# Altium PCB 控制盒基板-布局备份.PcbDoc (part 2 of 2)
Units mil, origin at the board's own origin, x right, y up, seen from the top; angles counter-clockwise.
Board outline 12046.02 x 6189.14 mil, 4 copper layers (Top Layer, SGND, POWER, Bottom Layer); 371 components, 226 nets, 1114 pads, 72 vias.
Unrouted connection lines stored in the file: 329.
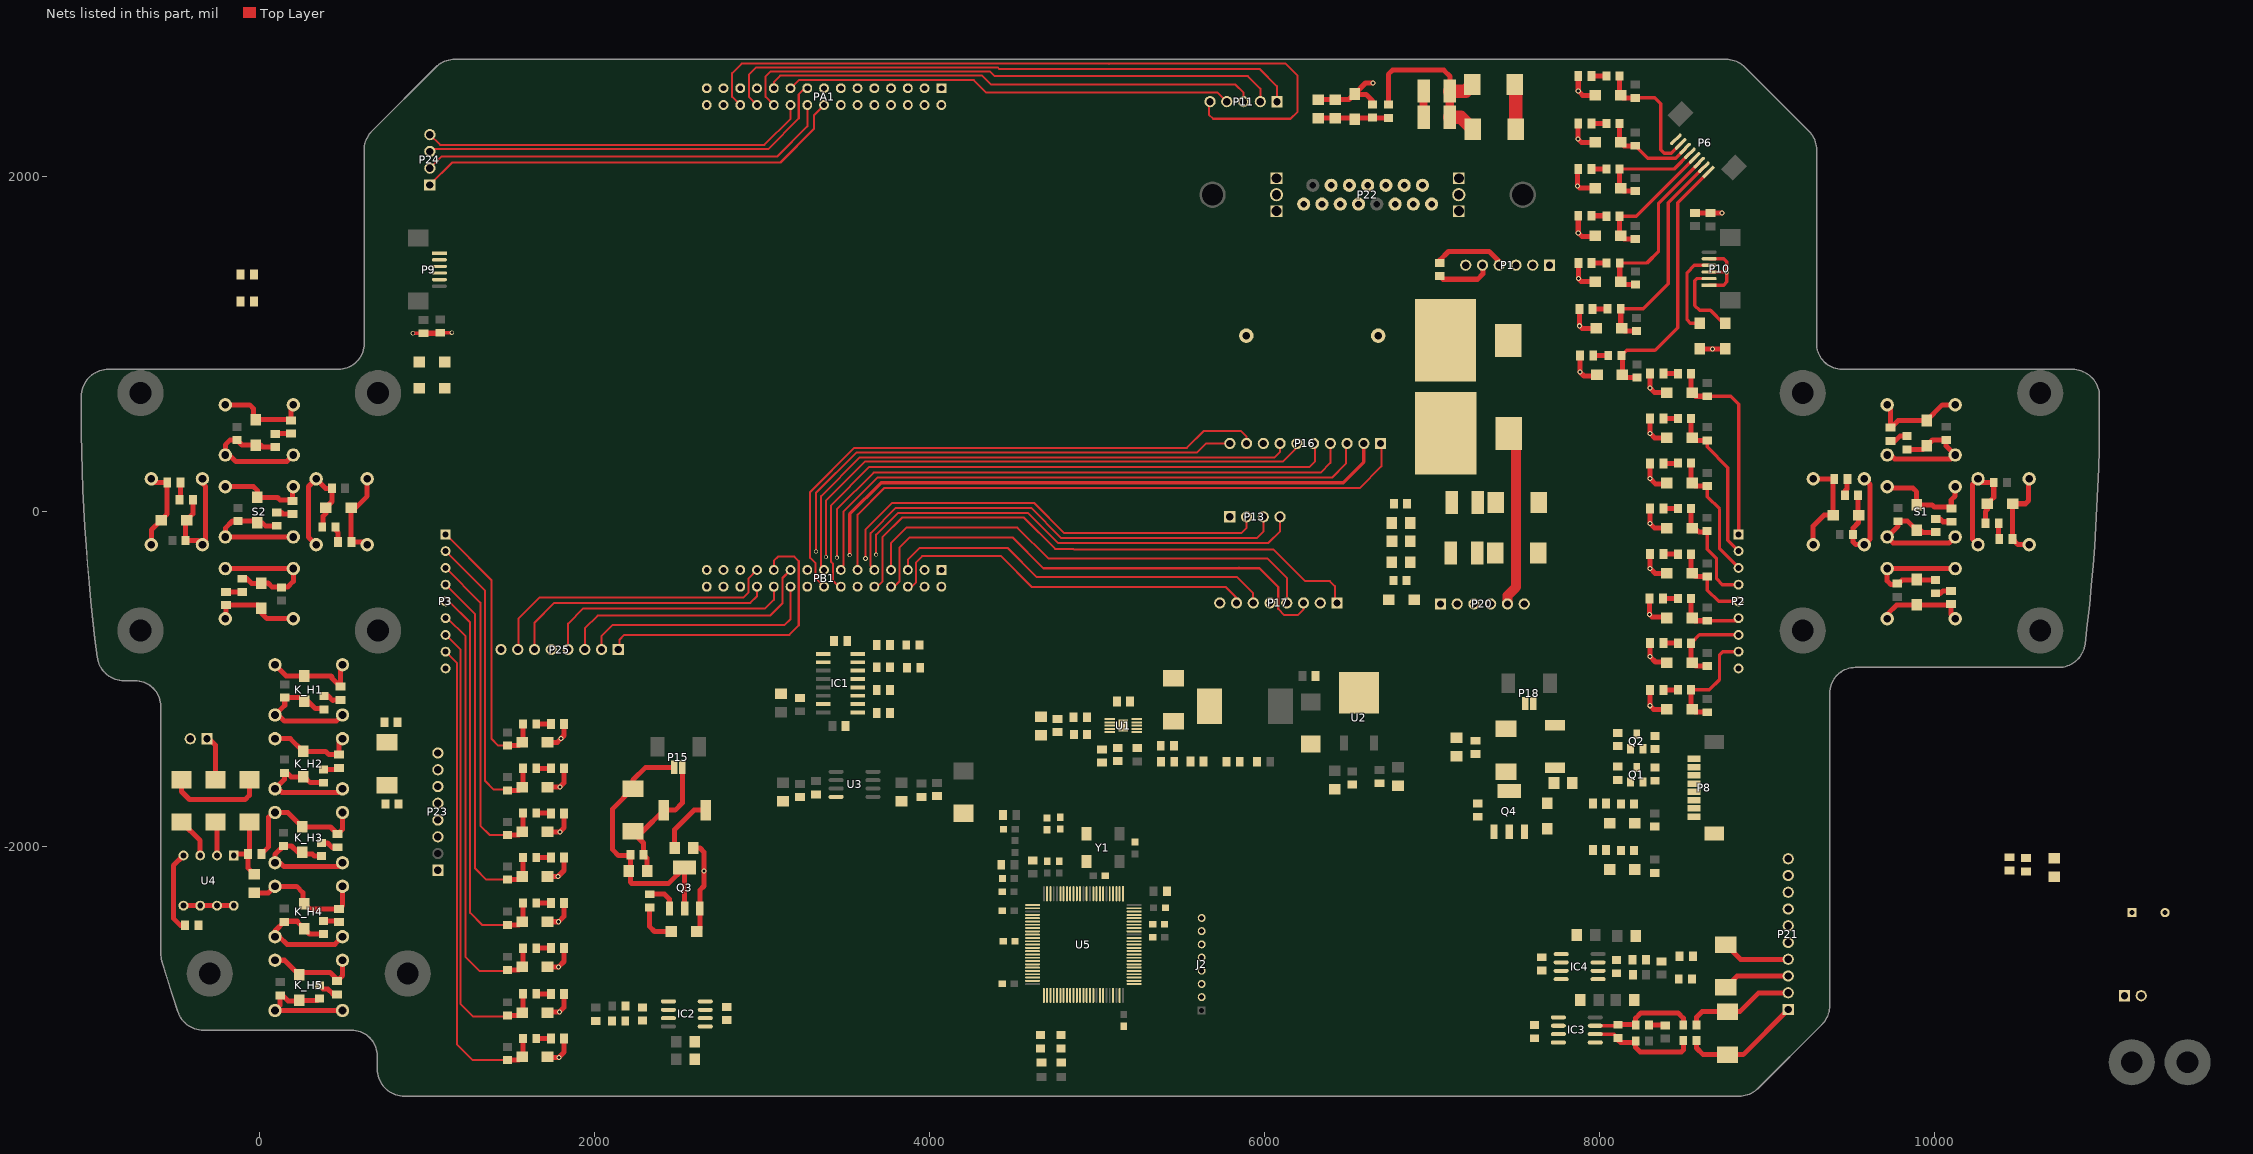
[diagram p3: the nets of this part, all layers, seen from the top]

## Via types
v1: diameter 30, hole 18, Top Layer to Bottom Layer, tented both sides, 57 vias
v2: diameter 28, hole 18, Top Layer to Bottom Layer, tented both sides, 10 vias
v3: diameter 24, hole 16, Top Layer to Bottom Layer, tented both sides, 5 vias

## Nets (pads, with @x,y where several pads share a name; then routed paths per layer and width w, separated by ;. In a path a pad name is that pad's centre, name@x,y a point inside that pad or via, vN(x,y) a via of type N, cw(c..) or ccw(c..) an arc to the next point about the centre after c; other vN are vias at no path point) (continued)
+PWR_S: C1.2 C2.2 C5.1 C77.1 C78.2 C80.2 C81.2 C87.2 D1.2 D2.2 L2.2 L3.2 P1.3 P1.4 P20.5 P22.5 P23.1 PA1.28 PA1.30 R1.1 R2.1 R83.1 R84.1 U1.2 U4.1 | length 2268.7
  Top Layer w30: U4.1@-152.5,-2050.98 -144.51,-2043 C80.2@-66.37,-2043 ; C77.1@-59,-1850.98 -59,-2035.63 C80.2@-66.37,-2043 ; C78.2@-30,-2163.88 -66.37,-2127.51 C80.2@-66.37,-2043 ; C81.2@2478.88,-2007 2478.88,-1897.12 2595,-1781 L2.2@2665.98,-1781 ; R1.1@7046,1485.37 7046,1502 7098,1554 7341,1554 7404,1491 P1.4@7404,1467
  Top Layer w60: P20.5@7450,-550 7450,-501 7501,-450 7501,424.98 D1.2@7457.98,468
A_LX: C71.1 D50.2 P10.4 U5.15 | length 517.6
  Top Layer w20: D50.2@8598.34,1124.45 8597.79,1125 8542,1125 8522,1145 8522,1428 8564.87,1470.87 P10.4@8654.01,1470.87
A_LY: C73.1 D52.2 P10.2 U5.16 | length 466.5
  Top Layer w20: P10.2@8654.01,1392.13 8580.13,1392.13 8568,1380 8568,1231 8597,1202 8662,1202 8739.55,1124.45 D52.2@8750.34,1124.45
A_RX: C72.1 D51.2 P9.4 U5.18
A_RY: C74.1 D53.2 P9.2 U5.33
AUDIO_OUT_L: C85.1 P17.6 PB1.5 | length 2322.7
  Top Layer w12: PB1.5@3871,-347 3871,-286 3942,-215 4466,-215 4641,-390 5837,-390 5931,-484 5931,-542 P17.6@5933,-544
AUDIO_OUT_R: P17.7 PB1.6 | length 2240.8
  Top Layer w12: PB1.6@3871,-447 3895,-447 3919,-423 3919,-303 3957,-265 4428,-265 4612,-449 5172,-449 5181,-449 5768,-449 5833,-514 P17.7@5833,-544
AUX: P11.5 PA1.26 | length 4493.2
  Top Layer w12: PA1.26@2871,2428 2822,2477 2822,2618 2879,2675 5072,2675 ; 5073,2674 5072,2675 ; P11.5@5675,2448 5668,2441 5668,2371 5693,2346 6155,2346 6198,2389 6198,2603 6126,2675 5072,2675
BAT1_ADC: C16.2 C18.2 C22.2 D8.2 R9.2 R11.1 U5.23
BAT1_FIN: D3.1 D4.1 F1.2 F2.2 R9.1
BAT1_IN: F1.1 F2.1 P20.1 P20.2
BAT2_ADC: C17.2 C19.2 C23.2 D9.2 R10.2 R12.1 U5.24 | length 421.8
  Top Layer w30: C17.2@6321,2350.07 6538,2350.07 6740.03,2350.07 R10.2@6742,2348.1
BAT2_FIN: D5.1 D6.1 F3.2 F4.2 R10.1 | length 1133.2
  Top Layer w30: R10.1@6740,2430.37 6739,2431.37 6739,2611 6764,2636 7070,2636 7106.74,2599.26 F3.2@7106.74,2511
  Top Layer w50: F4.2@7106.74,2355 F3.2@7106.74,2511
  Top Layer w80: F4.2@7106.74,2355 7171.05,2355 D6.1@7243.05,2283 ; F3.2@7106.74,2511 7200.05,2511 D5.1@7239.05,2550
BAT2_IN: F3.1 F4.1 P22.1 P22.2 | length 156
  Top Layer w50: F4.1@6949.26,2355 F3.1@6949.26,2511
BAT_IN: D3.2 D4.2 D5.2 D6.2 P1.1 P1.2 | length 268.7
  Top Layer w80: D5.2@7494.95,2550 7498.95,2546 D6.2@7498.95,2283
CAN1H: P14.1
CAN1L: P14.2
CLOCK: U5.12 Y1.3
CVBS1: P21.5 P22.16 PA1.23
CVBS2: P13.1 PA1.25
GND: R97.2 R98.1
GND_S: C116.1 C117.1 C118.1 C119.1 C120.1 C121.1 R104.2 R105.2 R106.2
GPT9_PWM_EVT: PB1.1
H_RST: PB1.4
I2C2_SCL: PA1.13
I2C2_SDA: PA1.14
I2C_SDA: U5.96
I2C_SDL: U5.95
JNRST: J2.6 U5.90
JOYSTICK_LEFTZ: U5.17
JOYSTICK_RIGHTZ: U5.34
JTCK: J2.3 U5.76
JTDI: J2.4 U5.77
JTDO: J2.5 U5.89
JTMS: J2.2 U5.72
K_M1: U5.35
KEYSWIN_A1: C32.1 R27.1 U5.97 | length 87.6
  Top Layer w30: C32.1@8380.37,826 8465.16,826 R27.1@8467.16,824
KEYSWIN_A2: C36.1 R35.1 U5.98 | length 86.8
  Top Layer w30: C36.1@8380.37,557 R35.1@8467.16,557
KEYSWIN_A3: C40.1 R43.1 U5.1 | length 87.6
  Top Layer w30: C40.1@8380.37,289 8465.16,289 R43.1@8467.16,291
KEYSWIN_A4: C44.1 R51.1 U5.2 | length 87.7
  Top Layer w30: C44.1@8380.37,20 8466.63,20 R51.1@8467.63,19
KEYSWIN_A5: C33.1 R28.1 U5.3 | length 88
  Top Layer w30: C33.1@8380.37,-251 8464.16,-251 R28.1@8467.16,-254
KEYSWIN_A6: C37.1 R36.1 U5.4 | length 89.8
  Top Layer w30: C37.1@8377.37,-518 R36.1@8467.16,-518
KEYSWIN_A7: C41.1 R44.1 U5.5 | length 87.2
  Top Layer w30: C41.1@8380.37,-784 8466.16,-784 R44.1@8467.16,-785
KEYSWIN_A8: C45.1 R52.1 U5.38 | length 87.6
  Top Layer w30: C45.1@8380.37,-1064 8465.16,-1064 R52.1@8467.16,-1062
KEYSWIN_B1: C34.1 R29.1 U5.39 | length 87.3
  Top Layer w30: R29.1@1653.37,-1266 C34.1@1740.63,-1266
KEYSWIN_B2: C38.1 R37.1 U5.40 | length 87.3
  Top Layer w30: R37.1@1653.37,-1531 C38.1@1740.63,-1531
KEYSWIN_B3: C42.1 R45.1 U5.41 | length 88.5
  Top Layer w30: R45.1@1653.37,-1798 1737.63,-1798 C42.1@1740.63,-1801
KEYSWIN_B4: C46.1 R53.1 U5.42 | length 87.7
  Top Layer w30: R53.1@1653.37,-2063 1654.37,-2064 C46.1@1740.63,-2064
KEYSWIN_B5: C35.1 R30.1 U5.43 | length 87.7
  Top Layer w30: R30.1@1653.37,-2335 1739.63,-2335 C35.1@1740.63,-2336
KEYSWIN_B6: C39.1 R38.1 U5.44 | length 87.7
  Top Layer w30: R38.1@1653.37,-2605 1739.63,-2605 C39.1@1740.63,-2604
KEYSWIN_B7: C43.1 R46.1 U5.45 | length 87.7
  Top Layer w30: R46.1@1653.37,-2877 1739.63,-2877 C43.1@1740.63,-2878
KEYSWIN_B8: C47.1 R54.1 U5.46 | length 87.3
  Top Layer w30: R54.1@1653.37,-3144 C47.1@1740.63,-3144
KEYSWIN_ED: C51.1 R63.1 U5.29 | length 100.5
  Top Layer w30: R63.1@10005,-486.37 10006.63,-488 10033,-488 10049.37,-471.63 C51.1@10098,-471.63
KEYSWIN_EL: C54.1 R69.1 U5.30 | length 95.3
  Top Layer w30: R69.1@10382.37,-69 10382.37,-159.74 C54.1@10385.63,-163
KEYSWIN_EM: C60.1 R81.1 U5.32 | length 101.9
  Top Layer w30: R81.1@10006,-42.63 10032.63,-42.63 10049.37,-59.37 C60.1@10101,-59.37
KEYSWIN_ER: C57.1 R75.1 U5.31 | length 102.5
  Top Layer w30: R75.1@9463.63,99 9463.63,123.63 9477,137 9477,192.63 C57.1@9479.37,195
KEYSWIN_EU: C48.1 R57.1 U5.26 | length 110.5
  Top Layer w30: C48.1@9736,423.63 9764.63,423.63 9792.37,451.37 R57.1@9835,451.37
KEYSWIN_FD: C52.1 R64.1 U5.82 | length 97.1
  Top Layer w30: C52.1@-198,-478.63 -101.26,-478.63 R64.1@-101,-478.37
KEYSWIN_FL: C55.1 R70.1 U5.83 | length 97
  Top Layer w30: R70.1@454.37,-90 454.37,-107.37 471,-124 471,-179.63 C55.1@470.63,-180
KEYSWIN_FM: C61.1 R82.1 U5.85 | length 97.6
  Top Layer w30: R82.1@104,-4.63 133.63,-4.63 142.37,-13.37 C61.1@198,-13.37
KEYSWIN_FR: C58.1 R76.1 U5.84 | length 106
  Top Layer w30: R76.1@-475.37,72 -470.63,76.74 C58.1@-470.63,176
KEYSWIN_FU: C49.1 R58.1 U5.81 | length 94.9
  Top Layer w30: R58.1@95,464.37 97.26,466.63 C49.1@189,466.63
KEYSWIN_G1: C63.1 R88.1 U5.65
KEYSWIN_G2: C65.1 R92.1 U5.66
KEYSWIN_H1: C27.1 R18.1 U5.58 | length 109.8
  Top Layer w30: R18.1@387,-1100.63 412.63,-1100.63 439,-1127 443.63,-1122.37 C27.1@484,-1122.37
KEYSWIN_H2: C28.1 R19.1 U5.59 | length 95.2
  Top Layer w30: R19.1@384,-1538.63 464.74,-1538.63 C28.1@475,-1528.37
KEYSWIN_H3: C29.1 R20.1 U5.60 | length 106.7
  Top Layer w30: R20.1@372,-1976.63 407.63,-1976.63 433.37,-2002.37 C29.1@468,-2002.37
KEYSWIN_H4: C30.1 R21.1 U5.61 | length 97.2
  Top Layer w30: R21.1@383,-2441.63 469.26,-2441.63 C30.1@477,-2449.37
KEYSWIN_H5: C31.1 R22.1 U5.62 | length 127.3
  Top Layer w30: R22.1@359,-2826.63 381.37,-2849 410,-2849 441.37,-2880.37 C31.1@464,-2880.37
KEYSWIN_I1: C50.1 R62.1 U5.47 | length 90.5
  Top Layer w30: C50.1@7951.37,1767 8037.63,1767 R62.1@8040.63,1764
KEYSWIN_I2: C53.1 R68.1 U5.48 | length 89.3
  Top Layer w30: C53.1@7951.37,2046 R68.1@8040.63,2046
KEYSWIN_J1: C56.1 R74.1 U5.51 | length 89.3
  Top Layer w30: C56.1@7951.37,2318 R74.1@8040.63,2318
KEYSWIN_J2: C59.1 R80.1 U5.52 | length 89.3
  Top Layer w30: C59.1@7951.37,2601 R80.1@8040.63,2601
KEYSWIN_M2: C62.1 R87.1 U5.7 | length 89.3
  Top Layer w30: C62.1@7962.37,933 R87.1@8051.63,933
KEYSWIN_M3: C64.1 R91.1 U5.8 | length 90.1
  Top Layer w30: C64.1@7958.37,1210 8045.63,1210 R91.1@8047.63,1212
KEYSWIN_M4: C66.1 R94.1 U5.9 | length 89.7
  Top Layer w30: C66.1@7952.37,1486 8040.63,1486 R94.1@8041.63,1485
KEYSWLED_G1: R122.2 U5.64
KEYSWLED_G2: R123.2 U5.63
KJ_A1: D15.2 P2.1 R23.1 R27.2 | length 1199.7
  Top Layer w20: R23.1@8643,689.63 8782.37,689.63 8829.73,642.27 P2.1@8829.73,-134.96
  Top Layer w30: R27.2@8545.9,824 8545.9,715.89 D15.2@8551.79,710 8572.16,689.63 R23.1@8643,689.63
KJ_A2: D19.2 P2.2 R31.1 R35.2 | length 954.5
  Top Layer w20: R31.1@8643,426.63 8643,387 8766,264 8766,-171.23 P2.2@8829.73,-234.96
  Top Layer w30: R35.2@8545.9,557 8545.9,446.89 8566.16,426.63 R31.1@8643,426.63
KJ_A3: D23.2 P2.3 R39.1 R43.2 | length 819.2
  Top Layer w12: P2.3@8824.77,-330 P2.3@8829.73,-334.96
  Top Layer w20: D23.2@8551.79,172 D23.2@8570.16,153.63 ; R39.1@8643,153.63 8643,90 8716,17 8716,-221.23 P2.3@8829.73,-334.96
  Top Layer w30: R43.2@8545.9,291 8545.9,177.89 8570.16,153.63 R39.1@8643,153.63
KJ_A4: D27.2 P2.4 R47.1 R51.2 | length 669.4
  Top Layer w20: R47.1@8643,-119.37 8643,-224 8698,-279 8698,-400 8732.96,-434.96 P2.4@8829.73,-434.96
  Top Layer w30: R51.2@8546.37,19 8546.37,-92.58 D27.2@8551.79,-98 8570,-98 8592,-120 8642.37,-120 R47.1@8643,-119.37
KJ_A5: D16.2 P2.5 R24.1 R28.2 | length 510.8
  Top Layer w20: R24.1@8643,-387.37 8643,-468 8709.96,-534.96 P2.5@8829.73,-534.96
  Top Layer w30: R28.2@8545.9,-254 8545.9,-362.11 8571.16,-387.37 R24.1@8643,-387.37
KJ_A6: D20.2 P2.6 R32.1 R36.2 | length 409.5
  Top Layer w20: R32.1@8643,-650.37 8814.31,-650.37 P2.6@8829.73,-634.96
  Top Layer w30: R36.2@8545.9,-518 8545.9,-628.11 D20.2@8551.79,-634 8568.16,-650.37 R32.1@8643,-650.37
KJ_A7: D24.2 P2.7 R40.1 R44.2 | length 523.2
  Top Layer w20: R44.2@8545.9,-785 8595.94,-734.96 P2.7@8829.73,-734.96
  Top Layer w30: R44.2@8545.9,-785 8545.9,-896.11 D24.2@8551.79,-902 8571.16,-921.37 R40.1@8643,-921.37
KJ_A8: D28.2 P2.8 R48.1 R52.2 | length 681.8
  Top Layer w20: R52.2@8545.9,-1062 8655,-1062 8716,-1001 8716,-854 8735.04,-834.96 P2.8@8829.73,-834.96
  Top Layer w30: R52.2@8545.9,-1062 8545.9,-1173.11 8569.16,-1196.37 R48.1@8643,-1196.37
KJ_B1: D17.2 P3.1 R25.1 R29.2 | length 1653.3
  Top Layer w12: P3.1@1112.4,-134.96 1386,-408.56 1386,-1355 1426.37,-1395.37 R25.1@1481,-1395.37
  Top Layer w30: R25.1@1481,-1395.37 1549.37,-1395.37 D17.2@1568.74,-1376 1574.63,-1370.11 R29.2@1574.63,-1266
KJ_B2: D21.2 P3.2 R33.1 R37.2 | length 1835.8
  Top Layer w12: P3.2@1112.4,-234.96 1348,-470.56 1348,-1607 1399,-1658 1476.63,-1658 R33.1@1481,-1662.37
  Top Layer w30: R33.1@1481,-1662.37 1549.37,-1662.37 1574.63,-1637.11 R37.2@1574.63,-1531
KJ_B3: D25.2 P3.3 R41.1 R45.2 | length 2019.8
  Top Layer w12: P3.3@1112.4,-334.96 1320,-542.56 1320,-1875 1374.37,-1929.37 R41.1@1481,-1929.37
  Top Layer w30: R41.1@1481,-1929.37 1549.37,-1929.37 D25.2@1568.74,-1910 1574.63,-1904.11 R45.2@1574.63,-1798
KJ_B4: D29.2 P3.4 R49.1 R53.2 | length 2198.5
  Top Layer w12: P3.4@1112.4,-434.96 1289,-611.56 1289,-2129 1355.37,-2195.37 R49.1@1481,-2195.37
  Top Layer w30: R49.1@1481,-2195.37 1550.37,-2195.37 D29.2@1568.74,-2177 1574.63,-2171.11 R53.2@1574.63,-2063
KJ_B5: D18.2 P3.5 R26.1 R30.2 | length 2393.2
  Top Layer w12: P3.5@1112.4,-534.96 1131.96,-534.96 1258,-661 1258,-2394 1329.37,-2465.37 R26.1@1481,-2465.37
  Top Layer w30: R26.1@1481,-2465.37 1550.37,-2465.37 D18.2@1568.74,-2447 1574.63,-2441.11 R30.2@1574.63,-2335
KJ_B6: D22.2 P3.6 R34.1 R38.2 | length 2574.5
  Top Layer w12: P3.6@1112.4,-634.96 1122.96,-634.96 1232,-744 1232,-2658 1316,-2742 1473.37,-2742 R34.1@1481,-2734.37
  Top Layer w30: R34.1@1481,-2734.37 1550.37,-2734.37 1574.63,-2710.11 R38.2@1574.63,-2605
KJ_B7: D26.2 P3.7 R42.1 R46.2 | length 2762.9
  Top Layer w12: P3.7@1112.4,-734.96 1202,-824.56 1202,-2939 1276,-3013 1474.37,-3013 R42.1@1481,-3006.37
  Top Layer w30: R42.1@1481,-3006.37 1551.37,-3006.37 1574.63,-2983.11 R46.2@1574.63,-2877
KJ_B8: D30.2 P3.8 R50.1 R54.2 | length 2920.9
  Top Layer w12: P3.8@1112.4,-834.96 1179,-901.56 1179,-3179 1273.37,-3273.37 R50.1@1481,-3273.37
  Top Layer w30: R50.1@1481,-3273.37 1549.37,-3273.37 1574.63,-3248.11 R54.2@1574.63,-3144
KJ_G1: D46.2 P8.1 R86.1 R88.2
KJ_G2: D48.2 P8.3 R90.1 R92.2
KJ_I1: D33.2 P6.4 R59.1 R62.2 | length 806.4
  Top Layer w20: R62.2@8119.37,1764 8219,1764 P6.4@8567.01,2112.01
  Top Layer w30: R62.2@8119.37,1764 8119.37,1653.89 8145.63,1627.63 R59.1@8213,1627.63
KJ_I2: D36.2 P6.5 R65.1 R68.2 | length 670
  Top Layer w20: R68.2@8119.37,2046 8445.32,2046 P6.5@8539.17,2139.85
  Top Layer w30: R68.2@8119.37,2046 8119.37,1937.89 8142.63,1914.63 R65.1@8213,1914.63
KJ_J1: D39.2 P6.6 R71.1 R74.2 | length 564.8
  Top Layer w20: R71.1@8213,2184.63 8287.63,2110 8453.64,2110 P6.6@8511.33,2167.69
  Top Layer w30: R74.2@8119.37,2318 8119.37,2210.89 8145.63,2184.63 R71.1@8213,2184.63
KJ_J2: D42.2 P6.7 R77.1 R80.2 | length 801.7
  Top Layer w20: R77.1@8213,2470.63 8330.37,2470.63 8366,2435 8366,2161 8386,2141 8428.97,2141 P6.7@8483.49,2195.53
  Top Layer w30: R80.2@8119.37,2601 8119.37,2491.89 8140.63,2470.63 R77.1@8213,2470.63
KJ_M2: D45.2 P6.1 R85.1 R87.2 | length 1622.9
  Top Layer w20: R87.2@8130.37,933 8161.37,964 8331,964 8466,1099 8466,1843.97 P6.1@8650.52,2028.49
  Top Layer w30: R87.2@8130.37,933 8136.26,927.11 D45.2@8136.26,817 8151.63,801.63 R85.1@8224,801.63
KJ_M3: D47.2 P6.2 R89.1 R91.2 | length 1342.2
  Top Layer w20: R91.2@8126.37,1212 8260,1212 8410,1362 8410,1843.65 P6.2@8622.68,2056.33
  Top Layer w30: R91.2@8126.37,1212 8126.37,1100.89 D47.2@8132.26,1095 8148.63,1078.63 R89.1@8220,1078.63
KJ_M4: D49.2 P6.3 R93.1 R94.2 | length 1100.9
  Top Layer w20: R94.2@8120.37,1485 8283,1485 8352,1554 8352,1841.33 P6.3@8594.84,2084.17
  Top Layer w30: R94.2@8120.37,1485 8120.37,1377.89 D49.2@8126.26,1372 8142.63,1355.63 R93.1@8214,1355.63
L_M1: U5.36
LCD_PWM: PB1.2
LED1: R100.1 U5.53
LED2: R101.1 U5.54
LINE_IN_L: P17.3 P21.7 P22.9 PB1.8 | length 3028.4
  Top Layer w12: PB1.8@3771,-447 3789,-447 3820,-416 3820,-214 3821,-214 3882,-153 4496,-153 4680,-337 5846,-337 ; 5849,-334 5846,-337 ; P17.3@6233,-544 6233,-583 6199,-617 6119,-617 6082,-580 6082,-449 5970,-337 5846,-337
LINE_IN_R: P17.4 PB1.7 | length 2836
  Top Layer w12: PB1.7@3771,-347 3771,-185 3862,-94 4525,-94 4711,-280 6019,-280 6133,-394 P17.4@6133,-544
LJ_G1: P8.6 Q1.3
LJ_G2: P8.8 Q2.3
MIC_IN: P17.1 PB1.10 | length 3349.9
  Top Layer w12: PB1.10@3671,-447 3688,-447 3721,-414 3721,-150 3837,-34 4564,-34 4751,-221 4859,-221 4862,-224 6053,-224 6243,-414 6390,-414 6420,-444 6420,-531 P17.1@6433,-544
MT1_CTRL: D57.2 R95.2 U5.92 | length 256.9
  Top Layer w30: R95.2@2330,-2361.37 2330,-2476 2359,-2505 D57.2@2460.21,-2505
MT2_CTRL: D59.2 R96.2 U5.93
NetC3_2: C3.2 U1.4
NetC4_1: C4.1 D7.1 L1.1 U1.10
NetC4_2: C4.2 U1.1
NetC6_2: C6.2 R5.2 U1.8
NetC7_2: C7.2 R5.1
NetC79_1: C79.1 C82.2 D56.1 P15.2 Q3.2 Q3.4 | length 1653.7
  Top Layer w30: C82.2@2204.88,-2145 C82.2@2214.63,-2135.25 ; P15.2@2476.39,-1525.02 2305.98,-1525.02 2230,-1601 D56.1@2230,-1652.05 2109,-1773.05 2109,-2017 2143,-2051 2210.63,-2051 C79.1@2214.63,-2047 C82.2@2214.63,-2135.25 ; Q3.2@2539,-2367.05 Q3.4@2539,-2122.95 2443.95,-2218 2222,-2218 2214.63,-2210.63 C82.2@2214.63,-2135.25
NetC79_2: C79.2 C82.1 D56.2 L2.1 P15.1 | length 850.9
  Top Layer w30: C82.1@2315.12,-2145 2314.37,-2144.25 2314.37,-2068 C79.2@2293.37,-2047 2293.37,-1976.37 2230,-1913 D56.2@2230,-1907.95 2287.06,-1907.95 L2.1@2414.02,-1781 2482,-1781 2525.61,-1737.39 P15.1@2525.61,-1525.02
NetC83_1: C83.1 U4.2 | length 203.5
  Top Layer w30: C83.1@-261,-1850.98 -252.5,-1859.49 U4.2@-252.5,-2050.98
NetC84_1: C84.1 U4.3 | length 246.2
  Top Layer w30: C84.1@-464,-1850.98 -352.5,-1962.49 U4.3@-352.5,-2050.98
NetC85_2: C85.2 U4.4 | length 488.1
  Top Layer w30: U4.4@-452.5,-2050.98 -513,-2111.49 -513,-2426 -471,-2468 C85.2@-442.37,-2468
NetC86_1: C86.1 C88.2 D58.1 P18.2 Q4.2 Q4.4
NetC86_2: C86.2 C88.1 D58.2 L3.1 P18.1
NetC105_1: C105.1 IC1.3
NetC105_2: C105.2 IC1.1
NetC106_1: C106.1 IC1.5
NetC106_2: C106.2 IC1.4
NetC107_1: C107.1 IC1.6
NetC108_2: C108.2 IC1.2
NetC109_1: C109.1 IC1.8 R103.1
NetC111_1: C111.1 IC1.7 R102.1
NetD10_2: D10.2 K_H1.2 R13.1 R18.2 | length 825.6
  Top Layer w30: R18.2@387,-1179.37 382.63,-1175 336,-1175 292.79,-1131.79 D10.2@268,-1131.79 245.58,-1109.37 R13.1@152,-1109.37 152,-1154.69 K_H1.2@93.7,-1212.99 113.99,-1212.99 151,-1250 459.84,-1250 K_H1.2@496.85,-1212.99
NetD11_2: D11.2 K_H2.2 R14.1 R19.2 | length 798.2
  Top Layer w30: R19.2@384,-1617.37 383.63,-1617 305,-1617 269.79,-1581.79 D11.2@262,-1581.79 188.79,-1581.79 165.37,-1558.37 R14.1@151,-1558.37 151,-1596.64 K_H2.2@93.7,-1653.94 113.94,-1653.94 136,-1676 474.79,-1676 K_H2.2@496.85,-1653.94
NetD12_2: D12.2 K_H3.2 R15.1 R20.2 | length 796.9
  Top Layer w30: R20.2@372,-2055.37 329.37,-2055.37 317,-2043 267.21,-2043 D12.2@257,-2032.79 230.79,-2032.79 192.37,-1994.37 R15.1@144,-1994.37 93.7,-2044.67 K_H3.2@93.7,-2094.88 124.88,-2094.88 148,-2118 473.73,-2118 K_H3.2@496.85,-2094.88
NetD13_2: D13.2 K_H4.2 R16.1 R21.2 | length 823.2
  Top Layer w30: R21.2@383,-2520.37 299.58,-2520.37 229,-2449.79 229,-2444 152.37,-2444 93.7,-2502.67 K_H4.2@93.7,-2535.83 119.83,-2535.83 166,-2582 450.68,-2582 K_H4.2@496.85,-2535.83
NetD14_2: D14.2 K_H5.2 R17.1 R22.2 | length 759.7
  Top Layer w30: R22.2@359,-2905.37 348.58,-2915.79 D14.2@238,-2915.79 234.79,-2919 171,-2919 138.37,-2886.37 R17.1@125,-2886.37 125,-2945.47 K_H5.2@93.7,-2976.77 K_H5.2@496.85,-2976.77
NetD31_2: D31.2 R55.1 R57.2 S1.2 | length 794.8
  Top Layer w30: S1.2@9716.57,338.98 9737.02,338.98 9761,315 10098.5,315 S1.2@10122.48,338.98 10069,392.46 R55.1@10069,428.63 9987.42,428.63 9931.42,372.63 R57.2@9835,372.63
NetD32_2: D32.2 R56.1 R58.2 S2.2 | length 826
  Top Layer w30: R58.2@95,385.63 20.37,385.63 7.79,398.21 D32.2@-20,398.21 -103.58,398.21 R56.1@-133,427.63 -175.37,427.63 -202.95,400.05 S2.2@-202.95,338.98 -178.98,338.98 -140,300 163.98,300 S2.2@202.95,338.98
NetD34_2: D34.2 R60.1 R63.2 S1.4 | length 786.8
  Top Layer w30: R63.2@10005,-407.63 9806,-407.63 9780,-433.63 9738.63,-433.63 9716.57,-411.57 S1.4@9716.57,-338.98 S1.4@10122.48,-338.98
NetD35_2: D35.2 R61.1 R64.2 S2.4 | length 825.9
  Top Layer w30: S2.4@-202.95,-338.98 S2.4@202.95,-338.98 202.95,-415.05 168,-450 R61.1@130.37,-450 ; R64.2@-101,-399.63 -73.37,-399.63 -45,-428 9.21,-428 D35.2@12,-425.21 52.21,-425.21 77,-450 R61.1@130.37,-450 ; R61.1@132,-451.63 R61.1@130.37,-450
NetD37_2: D37.2 R66.1 R69.2 S1.8 | length 787.6
  Top Layer w30: S1.8@10258.9,-196.46 10226,-163.56 10226,163.56 S1.8@10258.9,196.46 10280.35,175 R66.1@10352.63,175 10352.63,86.42 D37.2@10314.21,48 10314.21,14.21 10303,3 10303,-68.37 R69.2@10303.63,-69
NetD38_2: D38.2 R67.1 R70.2 S2.8 | length 802.2
  Top Layer w30: S2.8@339.37,-196.46 294,-151.09 294,151.09 S2.8@339.37,196.46 395.83,140 R67.1@433.63,140 433.63,61.42 D38.2@397.21,25 397.21,-9.79 381,-26 381,-84.63 R70.2@375.63,-90
NetD40_2: D40.2 R72.1 R75.2 S1.6 | length 789.7
  Top Layer w30: R75.2@9542.37,99 9542.37,-16.58 D40.2@9545.79,-20 9545.79,-64.21 9512,-98 9512,-134.63 R72.1@9512.37,-135 9512.37,-179.37 9529.46,-196.46 S1.6@9580.16,-196.46 9614,-162.61 9614,162.61 S1.6@9580.16,196.46
NetD41_2: D41.2 R73.1 R76.2 S2.6 | length 786.2
  Top Layer w30: R76.2@-392.63,76 R76.2@-396.63,72 -396.63,-12.42 D41.2@-434.21,-50 -439.63,-55.42 R73.1@-439.63,-171 -364.83,-171 S2.6@-339.37,-196.46 -320,-177.09 -320,151 -339.37,170.37 S2.6@-339.37,196.46
NetD43_2: D43.2 R78.1 R81.2 S1.10 | length 810.1
  Top Layer w30: R81.2@10006,-121.37 10003.37,-124 9929,-124 9915.79,-110.79 D43.2@9893,-110.79 9838.58,-56.37 R78.1@9781,-56.37 9781,-85.57 S1.10@9716.57,-150 9752.57,-186 10086.48,-186 S1.10@10122.48,-150
NetD44_2: D44.2 R79.1 R82.2 S2.10 | length 796.3
  Top Layer w30: R82.2@104,-83.37 101.37,-86 38,-86 17.79,-65.79 D44.2@-12,-65.79 -22.42,-55.37 -160.37,-55.37 -202.95,-97.95 S2.10@-202.95,-150 S2.10@202.95,-150
NetD60_2: D60.2 R100.2
NetD61_2: D61.2 R101.2
NetIC2_6: IC2.6 R108.1 R109.2 R117.2
NetIC2_7: IC2.7 R107.1 R108.2 R116.2
NetIC3_6: IC3.6 R111.1 R112.2 R119.2 | length 670.5
  Top Layer w20: IC3.6@7974.04,-3117.71 8087.34,-3117.71 R111.1@8110,-3140.37
  Top Layer w30: R111.1@8110,-3140.37 8110,-3153 8126,-3169 8204.63,-3169 R112.2@8215.63,-3158 8215.63,-3197.63 8242,-3224 8488,-3224 8499.63,-3212.37 R119.2@8499.63,-3156
NetIC3_7: IC3.7 R110.1 R111.2 R118.2 | length 635.8
  Top Layer w20: IC3.7@7974.04,-3067.71 8103.92,-3067.71 R111.2@8110,-3061.63
  Top Layer w30: R111.2@8110,-3061.63 8214.26,-3061.63 R110.1@8215.63,-3063 8215.63,-3022.37 8247,-2991 8468,-2991 8499.63,-3022.63 R118.2@8499.63,-3063
NetIC4_6: IC4.6 R114.1 R115.2 R121.2
NetIC4_7: IC4.7 R113.1 R114.2 R120.2
NetP1_5: P1.5 R1.2 | length 326
  Top Layer w30: R1.2@7046,1406.63 7064.63,1388 7272,1388 7304,1420 P1.5@7304,1467
NetP8_5: P8.5 R83.2
NetP8_7: P8.7 R84.2
NetQ1_1: Q1.1 R122.1
NetQ2_1: Q2.1 R123.1
NetQ3_1: Q3.1 R95.1 | length 185.4
  Top Layer w30: R95.1@2330,-2282.63 2418.63,-2282.63 2448.45,-2312.45 Q3.1@2448.45,-2367.05
NetQ4_1: Q4.1 R96.1
NetR0_2: R0.2 R98.2 U5.94
NetR2_2: R2.2 R3.2 U1.3
NetR4_2: R4.2 U1.5
NetR6_1: R6.1 R7.2 U1.7
NetR8_1: R8.1 U1.6
NetR97_1: R97.1 U5.37
NRST: C89.1 J2.7 R99.2 U5.14
OMAP__CAN1H: PB1.26
OMAP__CAN1L: PB1.25
OMAP_RS232_RXD1: PA1.8 R103.2
OMAP_RS232_RXD2: PA1.4
OMAP_RS232_TXD1: PA1.6 R102.2
OMAP_RS232_TXD2: PA1.2
"RJ45 RX+": P24.3 PA1.17 | length 2492.9
  Top Layer w12: P24.3@1018,2151 1032,2165 3037,2165 3220,2348 3220,2491 3257,2528 PA1.17@3271,2528
"RJ45 RX-": P24.4 PA1.20 | length 2324.9
  Top Layer w12: P24.4@1018,2251 1079,2190 3015,2190 3171,2346 PA1.20@3171,2428
"RJ45 TX+": P24.1 PA1.16 | length 2599.2
  Top Layer w12: P24.1@1018,1951 1152,2085 3111,2085 3311,2285 3311,2368 PA1.16@3371,2428
"RJ45 TX-": P24.2 PA1.18 | length 2483.6
  Top Layer w12: P24.2@1018,2051 1087,2120 3090,2120 3271,2301 PA1.18@3271,2428
RS232_RXD2: P23.4
RS232_TXD2: P23.5
RS485-A2: D62.2 P23.7 R117.1
RS485-A3: D63.2 P21.1 P22.15 R119.1 | length 719.8
  Top Layer w30: R119.1@8578.37,-3156 8578.37,-3200.37 8617.95,-3239.95 D63.2@8764,-3239.95 8857.05,-3239.95 P21.1@9126,-2971
RS485-A4: D64.2 P21.3 P22.13 R121.1 | length 401.1
  Top Layer w30: D64.2@8753,-2838.95 8820.95,-2771 P21.3@9126,-2771
RS485-B2: D62.1 P23.8 R116.1
RS485-B3: D63.1 P21.2 P22.14 R118.1 | length 654.3
  Top Layer w30: R118.1@8578.37,-3063 8578.37,-3016.63 8610.95,-2984.05 D63.1@8764,-2984.05 8836.95,-2984.05 8950,-2871 P21.2@9126,-2871
RS485-B4: D64.1 P21.4 P22.12 R120.1 | length 409.4
  Top Layer w30: D64.1@8753,-2583.05 8840.95,-2671 P21.4@9126,-2671
SGND: C1.1 C2.1 C3.1 C5.2 C6.1 C7.1 C8.2 C9.2 C10.1 C11.2 C12.1 C13.1 C14.1 C15.2 C16.1 C17.1 C18.1 C19.1 C20.2 C21.1 C22.1 C23.1 C24.1 C25.1 C26.1 C27.2 C28.2 C29.2 C30.2 C31.2 C32.2 C33.2 C34.2 C35.2 C36.2 C37.2 C38.2 C39.2 C40.2 C41.2 C42.2 C43.2 C44.2 C45.2 C46.2 C47.2 C48.2 C49.2 C50.2 C51.2 C52.2 C53.2 C54.2 C55.2 C56.2 C57.2 C58.2 C59.2 C60.2 C61.2 C62.2 C63.2 C64.2 C65.2 C66.2 C67.2 C68.2 C69.2 C70.2 C71.2 C72.2 C73.2 C74.2 C77.2 C78.1 C80.1 C81.1 C84.2 C87.1 C89.2 C90.2 C91.2 C92.1 C93.1 C94.2 C95.1 C96.2 C97.2 C98.2 C99.1 C100.2 C101.1 C102.2 C103.1 C104.2 C107.2 C109.2 C110.1 C111.2 C112.1 C113.1 C114.1 C115.1 D1.1 D2.1 D7.2 D8.1 D9.1 D10.1 D11.1 D12.1 D13.1 D14.1 D15.1 D16.1 D17.1 D18.1 D19.1 D20.1 D21.1 D22.1 D23.1 D24.1 D25.1 D26.1 D27.1 D28.1 D29.1 D30.1 D31.1 D32.1 D33.1 D34.1 D35.1 D36.1 D37.1 D38.1 D39.1 D40.1 D41.1 D42.1 D43.1 D44.1 D45.1 D46.1 D47.1 D48.1 D49.1 D50.1 D51.1 D52.1 D53.1 D57.1 D59.1 IC1.15 IC2.5 IC3.5 IC4.5 J2.8 K_H1.1 K_H2.1 K_H3.1 K_H4.1 K_H5.1 P1.6 P2.9 P3.9 P6.8 P8.2 P8.4 P9.1 P9.3 P9.5 P10.1 P10.3 P10.5 P12.2 P13.2 P13.4 P16.2 P16.4 P16.6 P16.8 P16.10 P17.2 P17.5 P17.8 P19.2 P20.3 P20.4 P20.6 P21.6 P21.8 P21.10 P22.3 P22.4 P22.6 P22.8 P22.10 P22.17 P22.19 P23.3 P23.6 P25.5 P25.8 PA1.7 PA1.9 PA1.10 PA1.11 PA1.12 PA1.15 PA1.27 PA1.29 PB1.17 PB1.18 PB1.29 PB1.30 Q1.2 Q2.2 Q3.3 Q4.3 R3.1 R4.1 R7.1 R11.2 R12.2 R99.1 R107.2 R110.2 R113.2 S1.1 S1.3 S1.5 S1.7 S1.9 S2.1 S2.3 S2.5 S2.7 S2.9 U1.9 U1.11 U2.2 U3.4 U4.5 U4.6 U4.7 U4.8 U5.10 U5.19 U5.20 U5.27 U5.49 U5.74 U5.99 Y1.2 | length 35369.8
  Top Layer w12: v3(3323,-237) 3322,-236 3322,112 3565,355 5598,355 5651,408 P16.10@5793,408 ; v3(3382,-270) 3383,-269 3383,68 3614,299 6109,299 6193,383 P16.6@6193,408 ; v3@3448,-275 v3(3447,-274) 3447,14 3667,234 6335,234 6393,292 P16.4@6393,408 ; v1(3619,-280) 3619,-105 3777,53 4624,53 4804,-127 5861,-127 5892.87,-95.13 P13.2@5892.87,-30 ; v3(3682,-256) 3682,-137 3813,-6 4586,-6 4766,-186 6024,-186 6092.87,-117.13 P13.4@6092.87,-30
  Top Layer w20: v2(916.63,1065.63) C70.2@981,1065.63 ; C68.2@1080,1068.63 1148.63,1068.63 v2(1149,1069) ; v3(3524,-259) 3524,-13 3711,174 6470,174 6593,297 P16.2@6593,408 ; P10.1@8654.01,1352.76 8740.76,1352.76 8760,1372 v1@8760,1434 ; P10.3@8654.01,1431.5 v1(8757.5,1431.5) v1@8760,1434 ; P10.5@8654.01,1510.24 8741.76,1510.24 8760,1492 v1@8760,1434
  Top Layer w30: S2.5@-644.29,-196.46 -644.29,-108.5 D41.1@-585.79,-50 -549.37,-13.58 C58.2@-549.37,176 -623.84,176 S2.5@-644.29,196.46 ; C84.2@-464,-1599.02 -464,-1669 -416,-1717 -84,-1717 -59,-1692 C77.2@-59,-1599.02 ; U4.5@-452.5,-2350.98 U4.6@-352.5,-2350.98 U4.7@-252.5,-2350.98 U4.8@-152.5,-2350.98 ; S2.3@-202.95,-638.19 -198,-633.23 C52.2@-198,-557.37 -7.42,-557.37 D35.1@12,-576.79 12,-604 46.19,-638.19 S2.3@202.95,-638.19 ; S2.9@-202.95,150 -34,150 -12,128 D44.1@-12,85.79 108.21,85.79 125,69 194.37,69 C61.2@198,65.37 198,145.05 S2.9@202.95,150 ; S2.1@-202.95,638.19 -57.19,638.19 -34,615 -34,563.79 D32.1@-20,549.79 184.58,549.79 C49.2@189,545.37 189,624.24 S2.1@202.95,638.19 ; C78.1@-30,-2274.12 55.41,-2274.12 K_H4.1@93.7,-2235.83 222.83,-2235.83 260,-2273 260,-2329.21 D13.1@269,-2338.21 301.42,-2370.63 C30.2@477,-2370.63 496.85,-2350.78 K_H4.1@496.85,-2235.83 ; C80.1@12.37,-2043 56,-1999.37 56,-1823 84.12,-1794.88 K_H3.1@93.7,-1794.88 170.67,-1794.88 D12.1@257,-1881.21 425.58,-1881.21 C29.2@468,-1923.63 496.85,-1894.78 K_H3.1@496.85,-1794.88 ; K_H5.1@93.7,-2676.77 150.56,-2676.77 D14.1@238,-2764.21 252.21,-2750 423,-2750 464,-2791 C31.2@464,-2801.63 496.85,-2768.78 K_H5.1@496.85,-2676.77 ; K_H2.1@93.7,-1353.94 185.73,-1353.94 D11.1@262,-1430.21 396.21,-1430.21 415.63,-1449.63 C28.2@475,-1449.63 475,-1375.79 K_H2.1@496.85,-1353.94 ; K_H1.1@93.7,-912.99 160.92,-980.21 D10.1@268,-980.21 429.21,-980.21 434,-985 434,-993.63 C27.2@484,-1043.63 484,-925.84 K_H1.1@496.85,-912.99 ; S2.7@644.29,-196.46 627.83,-180 C55.2@549.37,-180 548.79,-179.42 D38.1@548.79,25 576,25 644.29,93.29 S2.7@644.29,196.46 ; C70.2@981,1065.63 1077,1065.63 C68.2@1080,1068.63 ; D30.1@1720.31,-3254 1722.31,-3256 v1(1789,-3256) 1819.37,-3225.63 C47.2@1819.37,-3144 ; D26.1@1720.31,-2989 1723.31,-2986 v1(1791,-2986) 1819.37,-2957.63 C43.2@1819.37,-2878 ; D22.1@1720.31,-2716 v1(1787,-2716) 1819.37,-2683.63 C39.2@1819.37,-2604 ; D18.1@1720.31,-2447 v1(1787,-2447) 1819.37,-2414.63 C35.2@1819.37,-2336 ; D29.1@1720.31,-2177 v1(1783,-2177) 1819.37,-2140.63 C46.2@1819.37,-2064 ; D25.1@1720.31,-1910 v1(1795,-1910) 1819.37,-1885.63 C42.2@1819.37,-1801 ; D21.1@1720.31,-1643 v1(1794,-1643) 1819.37,-1617.63 C38.2@1819.37,-1531 ; D17.1@1720.31,-1376 1779,-1376 1819.37,-1335.63 C34.2@1819.37,-1266 ; C81.1@2589.12,-2007 2630,-2007 2655,-2032 2655,-2233 2629.55,-2258.45 Q3.3@2629.55,-2367.05 2629.55,-2487.24 D57.1@2611.79,-2505 ; C17.1@6321,2460.31 6504.52,2460.31 D9.1@6538,2493.79 ; R12.2@6645,2431.37 6645,2453 6607,2491 6540.79,2491 D9.1@6538,2493.79 ; v1(6648,2559) 6603.21,2559 D9.1@6538,2493.79 ; C50.2@7872.63,1767 v1(7872.63,1665.37) 7896,1642 7967.68,1642 D33.1@7973.68,1648 ; C53.2@7872.63,2046 7869,2042.37 v1(7869,1944) 7881,1932 D36.1@7973.68,1932 ; C56.2@7872.63,2318 7870,2315.37 v1(7870,2226) 7891,2205 D39.1@7973.68,2205 ; C59.2@7872.63,2601 v1(7872.63,2512.37) 7899,2486 D42.1@7973.68,2486 ; C66.2@7873.63,1486 v1(7873.63,1391.37) 7890,1375 7971.68,1375 D49.1@7974.68,1372 ; C64.2@7879.63,1210 v1(7879.63,1110.37) 7895,1095 D47.1@7980.68,1095 ; C62.2@7883.63,933 v1(7883.63,833.37) 7907,810 7977.68,810 D45.1@7984.68,817 ; R110.2@8294.37,-3063 8389.37,-3063 C114.1@8392,-3065.63 ; C37.2@8298.63,-515 v1(8298.63,-613.63) 8314,-629 8395.21,-629 D20.1@8400.21,-634 ; C45.2@8301.63,-1064 v1(8301.63,-1157.63) 8323,-1179 D28.1@8400.21,-1179 ; C41.2@8301.63,-784 v1(8301.63,-864.63) 8334,-897 8395.21,-897 D24.1@8400.21,-902 ; C33.2@8301.63,-251 v1(8301.63,-337.63) 8332,-368 D16.1@8400.21,-368 ; C44.2@8301.63,20 v1(8301.63,-70.63) 8329,-98 D27.1@8400.21,-98 ; C40.2@8301.63,289 v1(8301.63,198.37) 8335,165 8393.21,165 D23.1@8400.21,172 ; C36.2@8301.63,557 v1(8301.63,468.37) 8329,441 D19.1@8400.21,441 ; C32.2@8301.63,826 v1(8301.63,738.37) 8327,713 8397.21,713 D15.1@8400.21,710 ; D50.1@8598.34,972.87 D52.1@8750.34,972.87 ; C69.2@8661,1782.74 8571,1782.74 C67.2@8569.34,1784.4 8730.6,1784.4 v1(8732,1783) ; S1.5@9275.24,-196.46 9275.24,-84.76 9340,-20 D40.1@9394.21,-20 9394.21,188.58 C57.2@9400.63,195 9399.17,196.46 S1.5@9275.24,196.46 ; S1.3@9716.57,-638.19 9716.57,-612.43 9773.21,-555.79 D34.1@9892,-555.79 10092.58,-555.79 C51.2@10098,-550.37 10098,-613.71 S1.3@10122.48,-638.19 ; S1.9@9716.57,150 9724.57,142 9870,142 9893,119 D43.1@9893,40.79 9985.21,40.79 9998,28 10092.37,28 C60.2@10099,21.37 ; S1.1@9716.57,638.19 9736,618.76 C48.2@9736,502.37 9739.37,502.37 9781.79,544.79 D31.1@9952,544.79 10045.4,638.19 S1.1@10122.48,638.19 ; C60.2@10101,19.37 C60.2@10099,21.37 ; S1.9@10122.48,150 10122.48,94.48 10099,71 C60.2@10099,21.37 ; S1.7@10563.82,-196.46 10497.83,-196.46 C54.2@10464.37,-163 10464.37,46.58 D37.1@10465.79,48 10542,48 10560,66 10560,192.64 S1.7@10563.82,196.46
  other v1: 2655,-2145 1800.97,-1354.03 8675,972.87
SPEAKER_OUT: C83.2 P19.1 | length 272.8
  Top Layer w30: P19.1@-312,-1355 -299,-1355 -261,-1393 C83.2@-261,-1599.02
TV_OUT1: P21.9 P22.18 PB1.12
TV_OUT2: P13.3 PB1.9 | length 2812.2
  Top Layer w12: PB1.9@3671,-347 3649,-325 3649,-127 3799,23 4607,23 4785,-155 5956,-155 5992.87,-118.13 P13.3@5992.87,-30
UART1_R: IC1.9 U5.69
UART1_T: IC1.10 U5.68
UART2_E: IC2.2 IC2.3 R104.1 U5.88
UART2_R: IC2.1 U5.87
UART2_T: IC2.4 U5.86
UART3_E: IC3.2 IC3.3 R105.1 U5.57
UART3_R: IC3.1 U5.56
UART3_T: IC3.4 U5.55
UART4_E: IC4.2 IC4.3 R106.1 U5.80
UART4_R: IC4.1 U5.79
UART4_T: IC4.4 U5.78
USB_0_DM: P25.2 PB1.20 | length 1443.8
  Top Layer w12: P25.2@2043,-822 2043,-741 2107,-677 3134,-677 3171,-640 PB1.20@3171,-447
USB_0_DP: P25.3 PB1.19 | length 1587.6
  Top Layer w12: P25.3@1943,-822 1943,-696 2019,-620 2292,-620 2293,-619 3051,-619 3123,-547 3123,-395 PB1.19@3171,-347
USB_0_ID: P25.4 PB1.22 | length 1519.2
  Top Layer w12: P25.4@1843,-822 1843,-668 1935,-576 3020,-576 3071,-525 PB1.22@3071,-447
USB_0_VBUS: P25.1 PB1.21 | length 1775.2
  Top Layer w12: P25.1@2143,-822 2150,-815 2150,-763 2179,-734 3164,-734 3220,-678 3220,-294 3194,-268 3096,-268 3071,-293 PB1.21@3071,-347
USB_1_DM: P25.6 PB1.24 | length 1611
  Top Layer w12: P25.6@1643,-822 1643,-661 1760,-544 2931,-544 2971,-504 PB1.24@2971,-447
USB_1_DP: P25.7 PB1.23 | length 1780
  Top Layer w12: P25.7@1543,-822 1548,-817 1548,-636 1673,-511 2891,-511 2921,-481 2921,-397 PB1.23@2971,-347
VBAT: P12.1 PB1.3
VCC_3V3: PA1.1 PA1.3 PA1.5
VCC_5V0: PB1.27 PB1.28
VGA_B: P16.5 PB1.14 | length 3623.1
  Top Layer w12: PB1.14@3471,-447 3460,-447 3423,-410 3423,-309 3413,-299 3413,-243 3413,39 3642,268 6269,268 6300,299 6300,401 P16.5@6293,408
VGA_G: P16.3 PB1.13 | length 3596.6
  Top Layer w12: PB1.13@3471,-347 3471,-336 3488,-319 3488,3 3689,204 6403,204 6486,287 6486,401 P16.3@6493,408
VGA_HSYNC: P16.7 PB1.15 | length 3350.6
  Top Layer w12: PB1.15@3371,-347 3354,-330 3354,94 3585,325 6060,325 6093,358 P16.7@6093,408 P16.7@6096,405
VGA_R: P16.1 PB1.11 | length 3715.4
  Top Layer w12: PB1.11@3571,-347 3571,-17 3729,141 6568,141 6698,271 6698,403 P16.1@6693,408
VGA_VSYNC: P16.9 PB1.16 | length 3409.5
  Top Layer w12: PB1.16@3371,-447 3321,-397 3321,-308 3288,-275 3288,118 3551,381 5537,381 5639,483 5857,483 5893,447 P16.9@5893,408
X+: P11.1 PA1.24 | length 3510.7
  Top Layer w12: PA1.24@2971,2428 2922,2477 2922,2608 2967,2653 4407,2653 4418,2642 5973,2642 6074,2541 6074,2449 P11.1@6075,2448
X-: P11.2 PA1.22 | length 3277.4
  Top Layer w12: PA1.22@3071,2428 3022,2477 3022,2599 3052,2629 4361,2629 4390,2600 5901,2600 5975,2526 P11.2@5975,2448
Y+: P11.3 PA1.21 | length 2952.6
  Top Layer w12: PA1.21@3071,2528 3071,2565 3109,2603 4315,2603 4368,2550 5827,2550 5875,2502 P11.3@5875,2448
Y-: P11.4 PA1.19 | length 2676.9
  Top Layer w12: PA1.19@3171,2528 3173,2528 3221,2576 4265,2576 4337,2504 5719,2504 P11.4@5775,2448
pads on no net: IC1.11 IC1.12 IC1.13 IC1.14 J3.1 J4.1 J5.1 J6.1 J7.1 J8.1 J9.1 J10.1 J11.1 J12.1 J13.1 J14.1 P6.0 P8.9 P9.0 P10.0 P15.3 P15.4 P18.3 P18.4 P22.0 P22.7 P22.11 U3.1 U3.5 U3.7 U3.8 U5.6 U5.13 U5.25 U5.67 U5.70 U5.71 U5.73 U5.91 Y1.1

## Polygon pours and split planes (outlines as drawn)
SGND on SGND (split plane): 566 vertices, not listed, extent -1042.4,-3468.24 10963.66,2680.83
SGND on SGND (split plane): 9275.28,2159.38 9275.27,2159.18 9275.26,2159.18 9275.28,2159.38
SGND on SGND (split plane): 9354.01,-1082.68 9354,-1082.68 9354.01,-1082.62

## Keep-outs
Keep-Out Layer:
  lines w6: 982.87,-978.82 982.87,-92.99 1045.86,-92.99 1045.86,-978.82 982.87,-978.82 ; 8896.26,-978.82 8959.25,-978.82 8959.25,-92.99 8896.26,-92.99 8896.26,-978.82
  lines w8: 6299.21,2696.85 8753.67,2696.85 cw(c8753.67,2539.37) 8865.03,2650.73 9245.22,2270.54 cw(c9133.86,2159.18) 9291.34,2159.18 9291.34,1003.94 ccw(c9448.82,1003.94) 9448.82,846.46 10821.9,846.46 cw(c10821.9,688.98) 10979.37,690.07 cw(c-516.42,610.24) 10894.44,-786.86 cw(c10738.13,-767.72) 10738.13,-925.2 9527.56,-925.2 ccw(c9527.56,-1082.68) 9370.08,-1082.68 9370.08,-2946.58 cw(c9212.6,-2946.58) 9323.96,-3057.94 8943.77,-3438.13 cw(c8832.41,-3326.77) 8832.41,-3484.25 866.14,-3484.25 cw(c866.14,-3326.77) 708.66,-3326.77 708.66,-3248.03 ccw(c551.18,-3248.03) 551.18,-3090.55 -333.04,-3090.55 cw(c-333.04,-2933.07) -482.64,-2982.29 cw(c10437.68,610.24) -577.6,-2679.62 cw(c-426.71,-2634.55) -584.19,-2634.55 -584.19,-1161.42 ccw(c-741.67,-1161.42) -741.67,-1003.94 -806.94,-1003.94 cw(c-806.94,-846.46) -963.12,-866.69 cw(c10437.68,610.24) -1058.11,690.07 cw(c-900.63,688.98) -900.63,846.46 472.44,846.46 ccw(c472.44,1003.94) 629.92,1003.94 629.92,2159.18 cw(c787.4,2159.18) 676.05,2270.53 944.88,2539.37 1056.24,2650.73 cw(c1167.59,2539.37) 1167.59,2696.85 6310,2696.85

## Other copper
Top Layer:
  rectangle net BAT2_FIN: 7052,2191 7301,2652
  rectangle net BAT2_IN: 6786,1902 7019,2605
  rectangle net BAT_IN: 7437,2186 7753,2644
  rectangle net BAT_IN: 7675,1427 7790,2644
  rectangle net BAT_IN: 7568,-364 7790,1565
  rectangle net +PWR_S: 7351,209 7543,1566
  rectangle net BAT1_FIN: 7230,-325 7433,129
  rectangle net BAT1_IN: 7001,-592 7190,135

## Silkscreen, mask and mechanical layers (free items; w line width, h text height)
Top Overlay:
  circle w10: c9223.03,-712.51 r68.9
  circle w10: c9223.03,704.81 r68.9
  circle w10: c896.26,-2759.76 r68.9
  lines w10: 8888.39,-2358.97 8888.39,-2838 cw(c8885.13,-2838) 8885.13,-2841.26 8711.22,-2841.26 8711.22,-3388.5 1325.39,-3388.5 1325.39,-2827.87 1034.05,-2827.87 1034.05,-2661.17 1034.05,-2358.95 1037.57,-2355.43 1326,-2355.43 1326,-1136.53 2191.53,-1136.53 ccw(c2191.53,-1038.11) 2289.96,-1038.11 2289.96,-691.65 2614.76,-691.65 2614.76,-622.36 7786.02,-622.36 7786.02,-254.64 8475,-254.64 8475,-2358.97 8889,-2358.97 ; 1207.28,-535.35 1207.28,2614.26 5537.99,2614.26 5537.99,-535.35 1207.28,-535.35

## Text inside footprints (layer, text, board x,y; h text height)
PA1: Top Overlay "1" at 4171,2548 h30 r180; Top Overlay "2" at 4171,2448 h30 r180; Top Overlay "29" at 2611,2548 h30 r180; Top Overlay "30" at 2611,2448 h30 r180
PB1: Top Overlay "1" at 4171,-327 h30 r180; Top Overlay "2" at 4171,-427 h30 r180; Top Overlay "29" at 2611,-327 h30 r180; Top Overlay "30" at 2611,-427 h30 r180